# Altium PCB STM_AIO.PcbDoc (part 2 of 2)
Units mm, origin at the board's own origin, x right, y up, seen from the top; angles counter-clockwise.
Board outline 90 x 60 mm, 4 copper layers (Top Layer, GND, PWR, Bottom Layer), stack 1.57 mm thick; 60 components, 50 nets, 240 pads, 59 vias.
Unrouted connection lines stored in the file: 138.
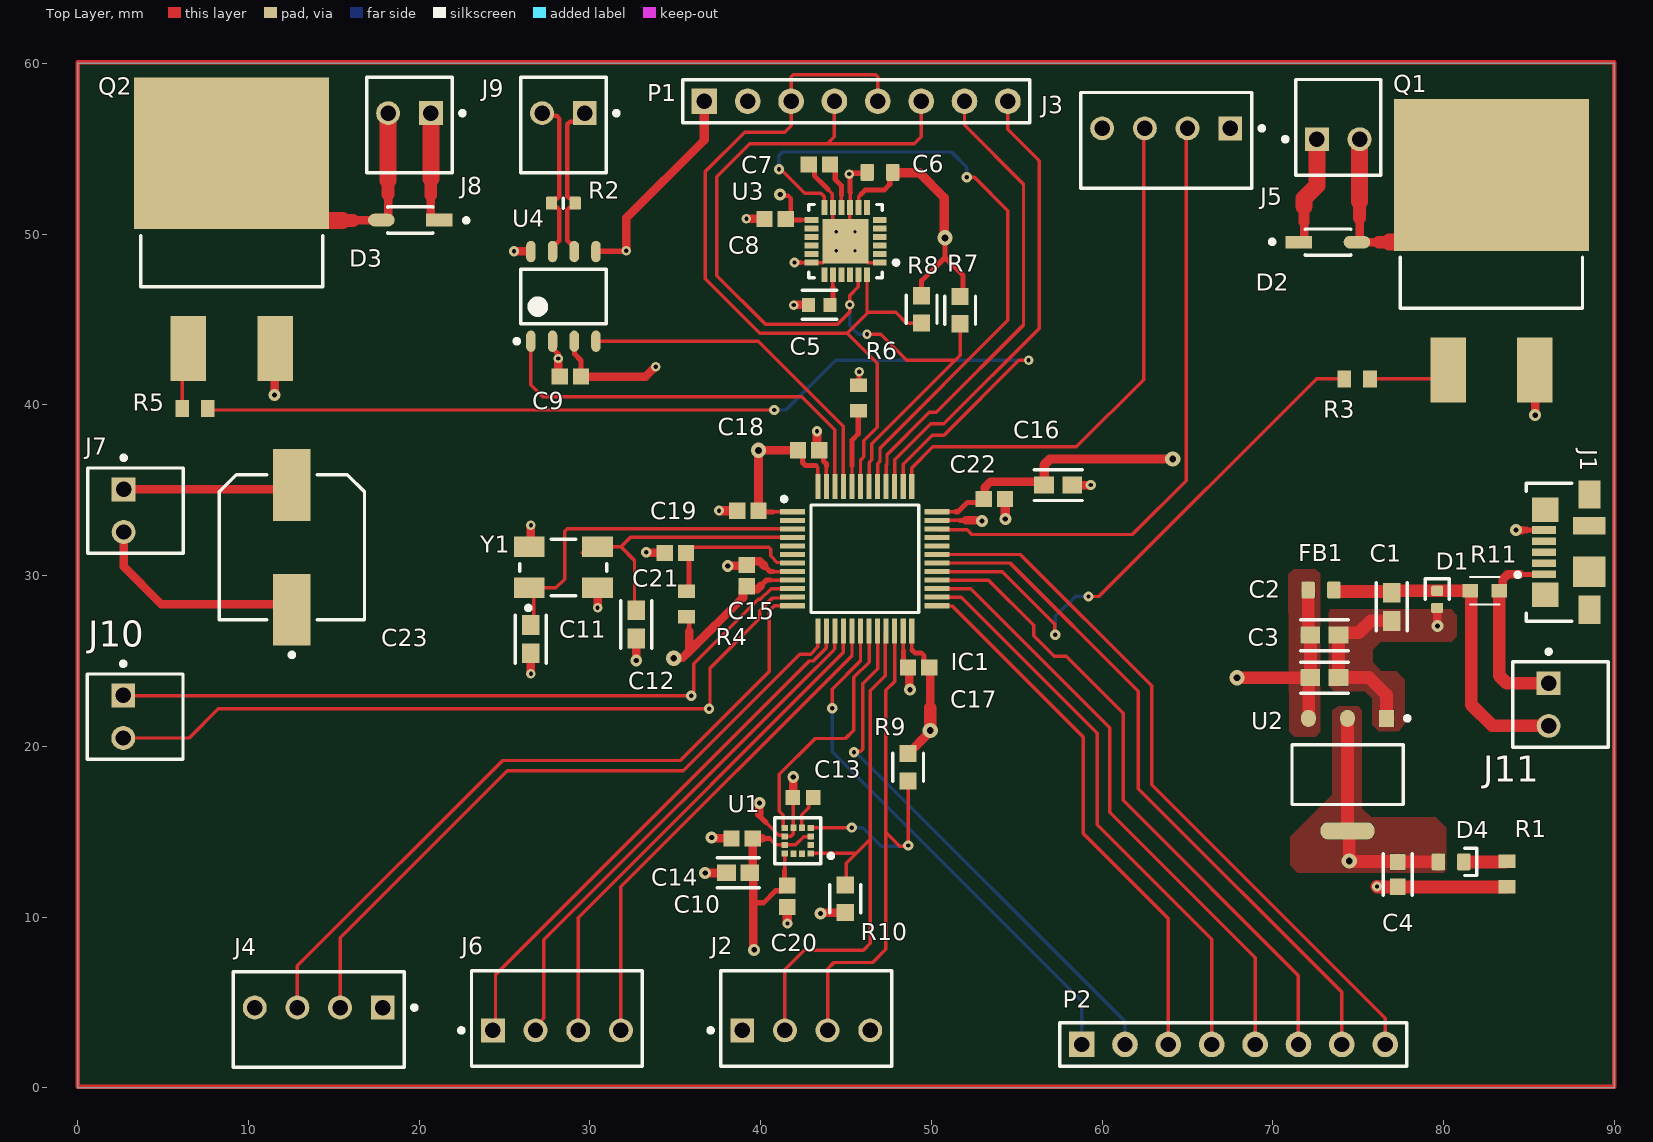
[diagram p0: Top Layer view]

## Via types
v1: diameter 0.6, hole 0.25, Top Layer to Bottom Layer, 16 vias
v2: diameter 0.7, hole 0.3, Top Layer to GND, 13 vias
v3: diameter 0.55, hole 0.25, Top Layer to GND, 8 vias
v4: diameter 0.9, hole 0.4, Top Layer to PWR, 6 vias
v5: diameter 0.5, hole 0.2, Top Layer to Bottom Layer, 4 vias
v6: diameter 0.6, hole 0.25, Top Layer to GND, 3 vias
v7: diameter 0.55, hole 0.25, Top Layer to Bottom Layer, 3 vias
v8: diameter 0.7, hole 0.3, Top Layer to PWR, 2 vias
v9: diameter 0.55, hole 0.25, Top Layer to PWR, 2 vias
v10: diameter 0.7, hole 0.33, Top Layer to PWR, 1 vias
v11: diameter 0.9, hole 0.4, Top Layer to Bottom Layer, 1 vias

## Nets (pads, with @x,y where several pads share a name; then routed paths per layer and width w, separated by ;. In a path a pad name is that pad's centre, name@x,y a point inside that pad or via, vN(x,y) a via of type N, cw(c..) or ccw(c..) an arc to the next point about the centre after c; other vN are vias at no path point) (continued)
VSS_1: (continued)
  Top Layer w0.75: C3.2@73.845,24.035 73.845,26.387 73.852,26.394 C2.2 ; C2.2@73.845,26.518 73.976,26.649 75.036,26.649 75.743,27.356 C1.2@76.948,27.356 ; C3.2 75.641,24.028 76.665,23.004 U2.1 ; v1(76.098,11.786) 76.114,11.77 R1.1@83.716,11.77
  other v2: 52.959,33.198
  other v5: 44.428,49.037 45.528,49.037 45.528,50.137
pads on no net: IC1.2 IC1.5 IC1.6 IC1.32 IC1.33 J1.2 J1.3 J1.4 J1.6 J1.7 J1.8 J1.9 J1.10 J1.11 U1.2 U1.11 U1.12 U3.2 U3.3 U3.4 U3.5 U3.6 U3.7 U3.14 U3.15 U3.16 U3.17 U3.19 U3.21 U3.22
copper on no net: | length 300
  Top Layer w0.254: 0,0.071 90,0.071 90,60.071 0,60.071 0,0.071

## Polygon pours and split planes (outlines as drawn)
VSS_1 on GND "VSS_1_L02_P000" (solid, pour order 0): 0.254,59.817 0.254,0.381 89.408,0.381 89.662,0.127 89.662,59.817
VSS_1 on PWR "VSS_1_L03_P001" (solid, pour order 1): 0.254,59.817 0.254,0.381 89.584,0.381 89.662,0.459 89.662,59.817
VSS_1 on Top Layer "VSS_1_L01_P007" (solid, pour order 7): 73.279,23.546 73.584,23.241 75.387,23.241 75.844,22.784 75.819,22.758 75.819,21.26 76.2,20.879 77.368,20.879 77.724,21.311 77.724,23.901 77.216,24.409 76.352,24.409 75.844,24.917 75.844,25.654 76.327,26.137 80.467,26.137 80.772,26.441 80.772,27.686 80.442,28.016 73.406,28.016 73.279,27.889
+3V3 on Top Layer "+3V3_L01_P008" (solid, pour order 8): 73.47,22.124 73.826,22.352 74.994,22.352 75.223,22.124 75.223,16.383 75.756,15.85 79.541,15.85 80.162,15.228 80.162,12.751 80.01,12.598 71.438,12.598 71.006,13.03 71.006,14.707 73.47,17.171
+5v on Top Layer "+5V_L01_P005" (solid, pour order 5): 71.222,30.378 72.492,30.378 72.771,30.099 72.771,20.851 72.517,20.574 71.247,20.574 70.968,20.879 70.917,30.074

## Text inside footprints (layer, text, board x,y; h text height)
D4: Top 3D Body "+" at 77.801,12.988 h1 r180